# Altium PCB LED0805-8_Pcb.PcbDoc
Units mil, origin at the board's own origin, x right, y up, seen from the top; angles counter-clockwise.
Board outline 400 x 800 mil, 2 copper layers (Top Layer, Bottom Layer); 32 components, 17 nets, 48 pads, 0 vias.
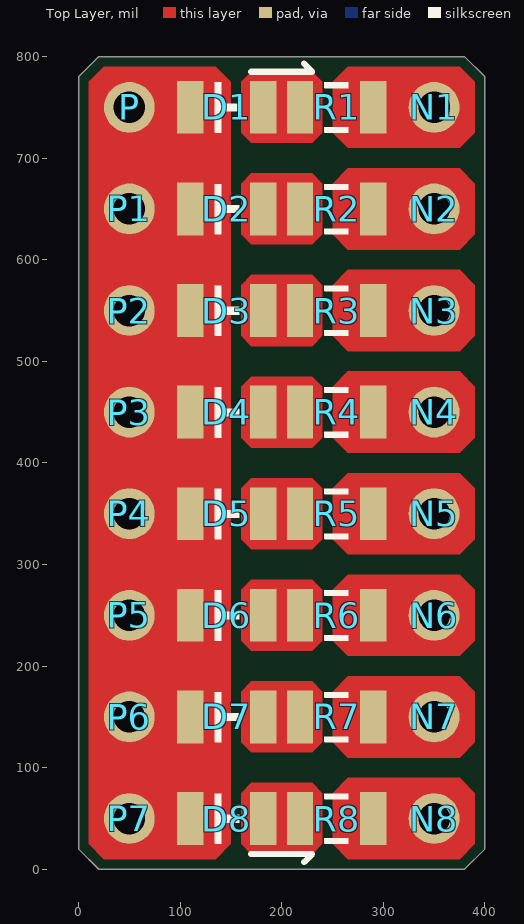
[diagram p0: Top Layer view]
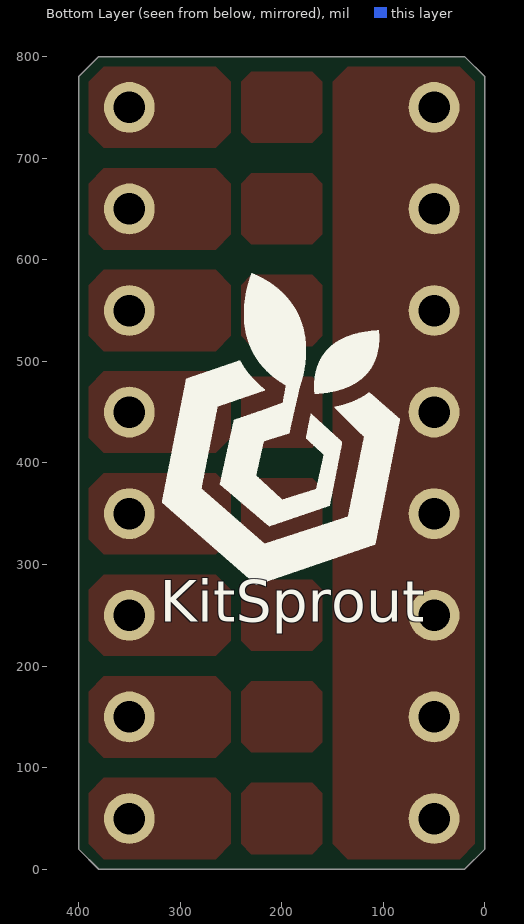
[diagram p1: Bottom Layer view, seen from below]

## Layer stack, top to bottom
Top Solder: solder mask 0.4, Solder Resist, Dk 3.5
Top Layer: signal copper 1.4
Dielectric1: dielectric 12.6, FR-4, Dk 4.8
Bottom Layer: signal copper 1.4
Bottom Solder: solder mask 0.4, Solder Resist, Dk 3.5

## Board outline
0,20 20,0 380,0 400,20 400,780 380,800 20,800 0,780

## Design rules (kind name [scope] priority, off if disabled: settings)
Clearance ClearancePolygon [InPolygon] p1: gap=6
Clearance [All] p2: gap=6
ComponentClearance [All] p1: gap=0 collisioncheckmode=3 verticalgap=0 showdistances=FALSE
Height [All] p1: minheight=0 maxheight=5000 prefheight=500
HoleToHoleClearance [All] p1: gap=6 allowstackedmicrovias=TRUE
MinimumSolderMaskSliver [All] p1: minsoldermaskwidth=6
PlaneConnect [All] p1: planeconnectstyle=Direct reliefexpansion=20 reliefentries=4 reliefconductorwidth=20 reliefairgap=10
PolygonConnect [All] p1: connectstyle=Direct reliefconductorwidth=20 reliefentries=4 polygonreliefangle="90 Angle" airgapwidth=10
RoutingVias [All] p1: holewidth=12 width=20 viastyle="Through Hole" minholewidth=12 minwidth=20 maxholewidth=100 maxwidth=200
SilkToSilkClearance [All] p1: silktosilkclearance=0
SilkToSolderMaskClearance SilkscreenOverComponentPads [IsPad] p1: minsilkscreentomaskgap=1 clearancetoexposedcopper=TRUE
SolderMaskExpansion [All] p1: expansion=0
Width [All] p1: maxlimit=30 minlimit=6 preferedwidth=10
22 further rules are at their usual default settings.

## Classes and differential pairs
component class LED0805-8_Sch: D1 D2 D3 D4 D5 D6 D7 D8 N1 N2 N3 N4 N5 N6 N7 N8 P R1 R2 R3 R4 R5 R6 R7 R8

## Components (designator, comment, footprint, x,y, rotation, side; value= is the part's Value field where it differs from the comment)
D1 "LED_0805" LED_0805_BLUE 146,750 r0 top
D2 "LED_0805" LED_0805_BLUE 146,650 r0 top
D3 "LED_0805" LED_0805_BLUE 146,550 r0 top
D4 "LED_0805" LED_0805_BLUE 146,450 r0 top
D5 "LED_0805" LED_0805_BLUE 146,350 r0 top
D6 "LED_0805" LED_0805_BLUE 146,250 r0 top
D7 "LED_0805" LED_0805_BLUE 146,150 r0 top
D8 "LED_0805" LED_0805_BLUE 146,50 r0 top
N1 "HDR-PAD_2.54" HDR-PAD_2.54 350,750 r90 top
N2 "HDR-PAD_2.54" HDR-PAD_2.54 350,650 r90 top
N3 "HDR-PAD_2.54" HDR-PAD_2.54 350,550 r90 top
N4 "HDR-PAD_2.54" HDR-PAD_2.54 350,450 r90 top
N5 "HDR-PAD_2.54" HDR-PAD_2.54 350,350 r90 top
N6 "HDR-PAD_2.54" HDR-PAD_2.54 350,250 r90 top
N7 "HDR-PAD_2.54" HDR-PAD_2.54 350,150 r90 top
N8 "HDR-PAD_2.54" HDR-PAD_2.54 350,50 r90 top
P "HDR-PAD_2.54" HDR-PAD_2.54 50,750 r90 top
P1 "HDR-PAD_2.54" HDR-PAD_2.54 50,650 r90 top (schematic designator P)
P2 "HDR-PAD_2.54" HDR-PAD_2.54 50,550 r90 top (schematic designator P)
P3 "HDR-PAD_2.54" HDR-PAD_2.54 50,450 r90 top (schematic designator P)
P4 "HDR-PAD_2.54" HDR-PAD_2.54 50,350 r90 top (schematic designator P)
P5 "HDR-PAD_2.54" HDR-PAD_2.54 50,250 r90 top (schematic designator P)
P6 "HDR-PAD_2.54" HDR-PAD_2.54 50,150 r90 top (schematic designator P)
P7 "HDR-PAD_2.54" HDR-PAD_2.54 50,50 r90 top (schematic designator P)
R1 "Res_0805" RES_0805 254,750 r0 top
R2 "Res_0805" RES_0805 254,650 r0 top
R3 "Res_0805" RES_0805 254,550 r0 top
R4 "Res_0805" RES_0805 254,450 r0 top
R5 "Res_0805" RES_0805 254,350 r0 top
R6 "Res_0805" RES_0805 254,250 r0 top
R7 "Res_0805" RES_0805 254,150 r0 top
R8 "Res_0805" RES_0805 254,50 r0 top

## Footprints (in the part's own frame and the unit in brackets; to place one, negate y for a bottom-side part, rotate by r counter-clockwise, add the part's x,y. Pads: shape width x height; smd on the part's side, far side on the other; paste and mask are expansions set on the pad)
HDR-PAD_2.54 [mil]
  round 50 hole 31: 1(0,0)
LED_0805_BLUE [mil]
  rect 26x52 smd: 1(-36,0) 2(36,0)
  silkscreen extent -12,-24 12,24, body extent -40,-25 40,25, height 43
RES_0805 [mil]
  rect 26x52 smd: 1(-36,0) 2(36,0)
  silkscreen extent -12,-24 12,24, body extent -39,-24 39,24, height 24

## Part data
D1 D2 D3 D4 D5 D6 D7 D8: "LED"
N1 N2 N3 N4 N5 N6 N7 N8 P P1 P2 P3 P4 P5 P6 P7: "Header"
R1 R2 R3 R4 R5 R6 R7 R8: "Resistor"

## Nets (pads, with @x,y where several pads share a name; then routed paths per layer and width w, separated by ;. In a path a pad name is that pad's centre, name@x,y a point inside that pad or via, vN(x,y) a via of type N, cw(c..) or ccw(c..) an arc to the next point about the centre after c; other vN are vias at no path point)
LED_N1: N1.1 R1.2
LED_N2: N2.1 R2.2
LED_N3: N3.1 R3.2
LED_N4: N4.1 R4.2
LED_N5: N5.1 R5.2
LED_N6: N6.1 R6.2
LED_N7: N7.1 R7.2
LED_N8: N8.1 R8.2
LED_P: D1.1 D2.1 D3.1 D4.1 D5.1 D6.1 D7.1 D8.1 P1.1 P2.1 P3.1 P4.1 P5.1 P6.1 P7.1 P.1
NetD1_2: D1.2 R1.1
NetD2_2: D2.2 R2.1
NetD3_2: D3.2 R3.1
NetD4_2: D4.2 R4.1
NetD5_2: D5.2 R5.1
NetD6_2: D6.2 R6.1
NetD7_2: D7.2 R7.1
NetD8_2: D8.2 R8.1

## Other copper
Top Layer:
  region net LED_N8: 265,90 250,75 250,25 265,10 375,10 390,25 390,75 375,90
  region net NetD8_2: 170,85 160,75 160,25 170,15 230,15 240,25 240,75 230,85
  region net LED_N7: 265,190 250,175 250,125 265,110 375,110 390,125 390,175 375,190
  region net NetD7_2: 170,185 160,175 160,125 170,115 230,115 240,125 240,175 230,185
  region net LED_N6: 265,290 250,275 250,225 265,210 375,210 390,225 390,275 375,290
  region net NetD6_2: 170,285 160,275 160,225 170,215 230,215 240,225 240,275 230,285
  region net LED_N5: 265,390 250,375 250,325 265,310 375,310 390,325 390,375 375,390
  region net NetD5_2: 170,385 160,375 160,325 170,315 230,315 240,325 240,375 230,385
  region net LED_N4: 265,490 250,475 250,425 265,410 375,410 390,425 390,475 375,490
  region net NetD4_2: 170,485 160,475 160,425 170,415 230,415 240,425 240,475 230,485
  region net LED_N3: 265,590 250,575 250,525 265,510 375,510 390,525 390,575 375,590
  region net NetD3_2: 170,585 160,575 160,525 170,515 230,515 240,525 240,575 230,585
  region net LED_N2: 265,690 250,675 250,625 265,610 375,610 390,625 390,675 375,690
  region net NetD2_2: 170,685 160,675 160,625 170,615 230,615 240,625 240,675 230,685
  region net NetD1_2: 170,785 160,775 160,725 170,715 230,715 240,725 240,775 230,785
  region net LED_P: 25,790 135,790 150,775 150,25 135,10 25,10 10,25 10,775
  region net LED_N1: 265,790 250,775 250,725 265,710 375,710 390,725 390,775 375,790

## Silkscreen, mask and mechanical layers (free items; w line width, h text height)
Top Overlay:
  lines w6: 170,15 230,15 222,7 ; 170,785 230,785 222,793
Bottom Overlay:
  drawing of 4246 lines, arcs and shapes, not listed
  text "KitSprout" at 320,230 h70
Top Solder:
  region: 75,90 25,90 10,75 10,25 25,10 75,10
  region: 75,190 25,190 10,175 10,125 25,110 75,110
  region: 75,290 25,290 10,275 10,225 25,210 75,210
  region: 75,390 25,390 10,375 10,325 25,310 75,310
  region: 75,490 25,490 10,475 10,425 25,410 75,410
  region: 75,590 25,590 10,575 10,525 25,510 75,510
  region: 75,690 25,690 10,675 10,625 25,610 75,610
  region: 75,790 25,790 10,775 10,725 25,710 75,710
  region: 325,410 375,410 390,425 390,475 375,490 325,490
  region: 325,510 375,510 390,525 390,575 375,590 325,590
  region: 325,610 375,610 390,625 390,675 375,690 325,690
  region: 325,710 375,710 390,725 390,775 375,790 325,790
  region: 325,310 375,310 390,325 390,375 375,390 325,390
  region: 325,210 375,210 390,225 390,275 375,290 325,290
  region: 325,110 375,110 390,125 390,175 375,190 325,190
  region: 325,10 375,10 390,25 390,75 375,90 325,90
Mechanical 1:
  the board outline again, w2

## Dimensions
380,800 to 380,0 on Mechanical 13
0,780 to 400,780 on Mechanical 13